# Altium PCB PCB.PcbDoc
Units mm, origin at the board's own origin, x right, y up, seen from the top; angles counter-clockwise.
Board outline 65 x 95 mm, 2 copper layers (Top Layer, Bottom Layer); 35 components, 28 nets, 121 pads, 35 vias.
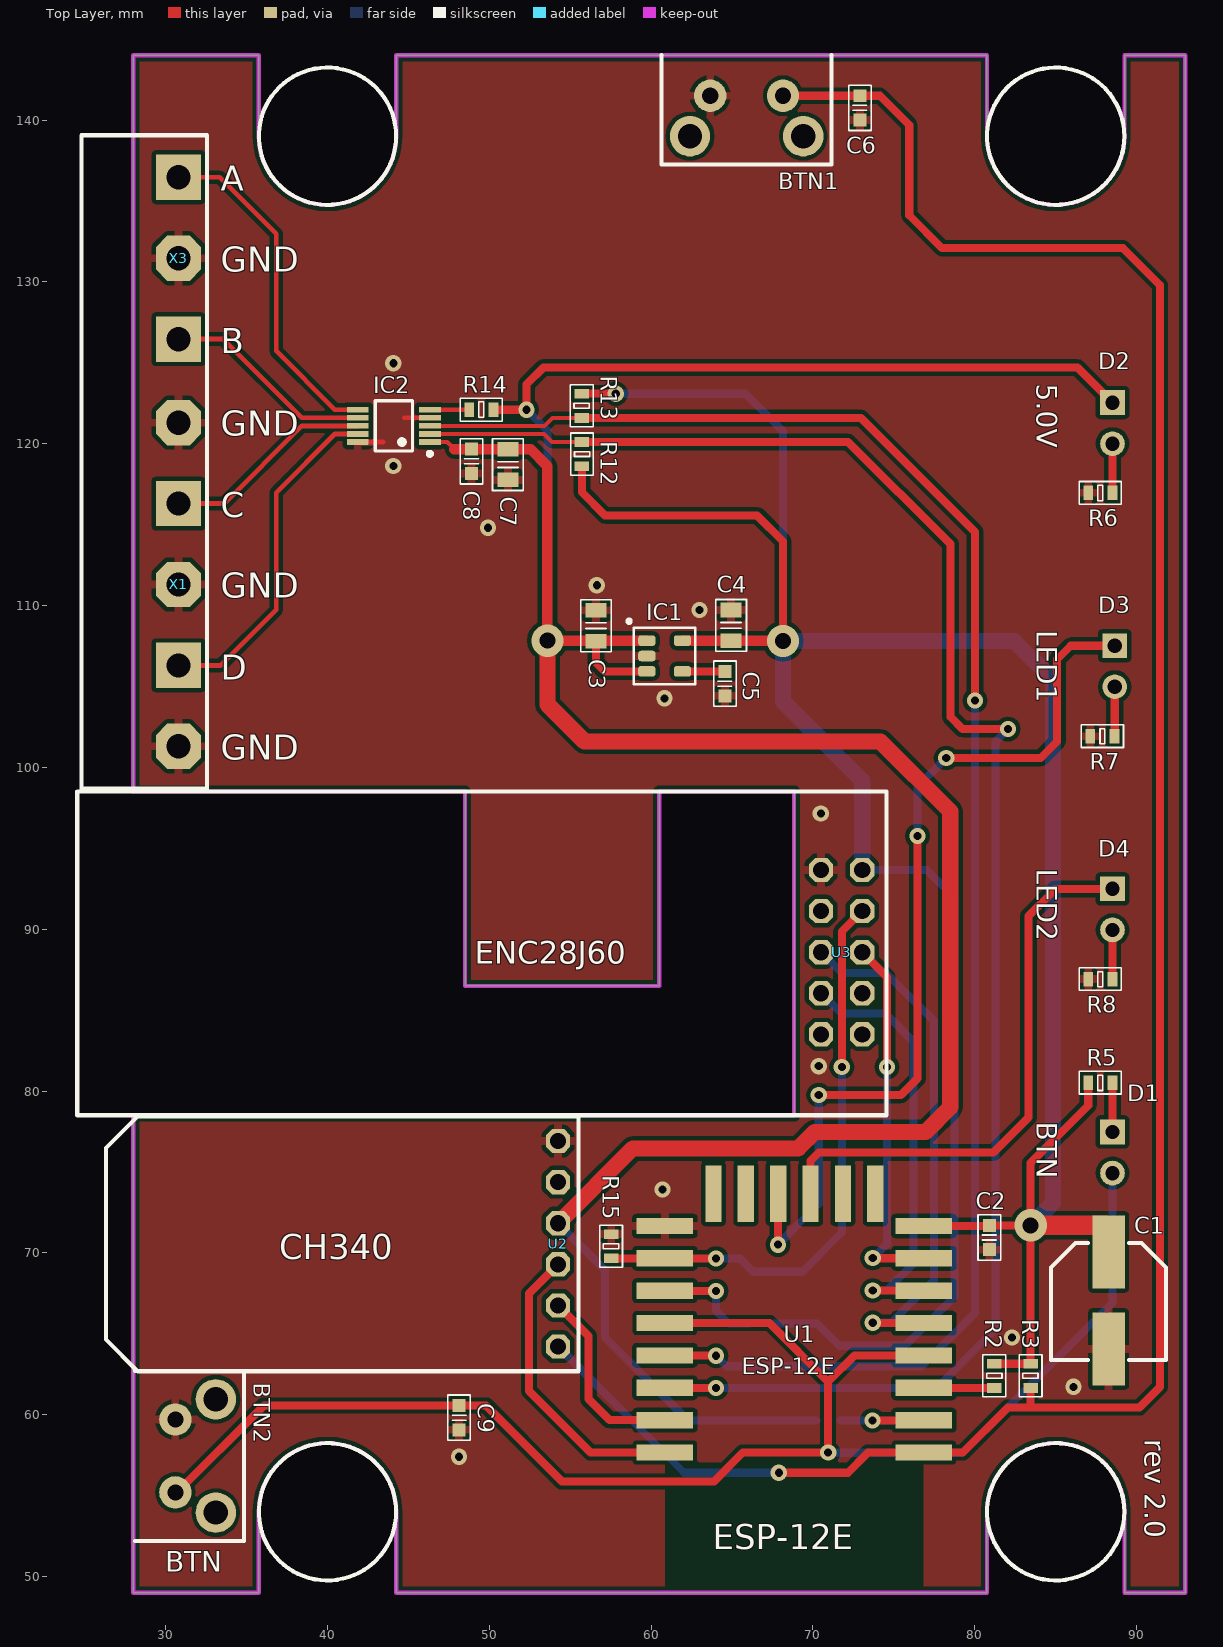
[diagram p0: Top Layer view]
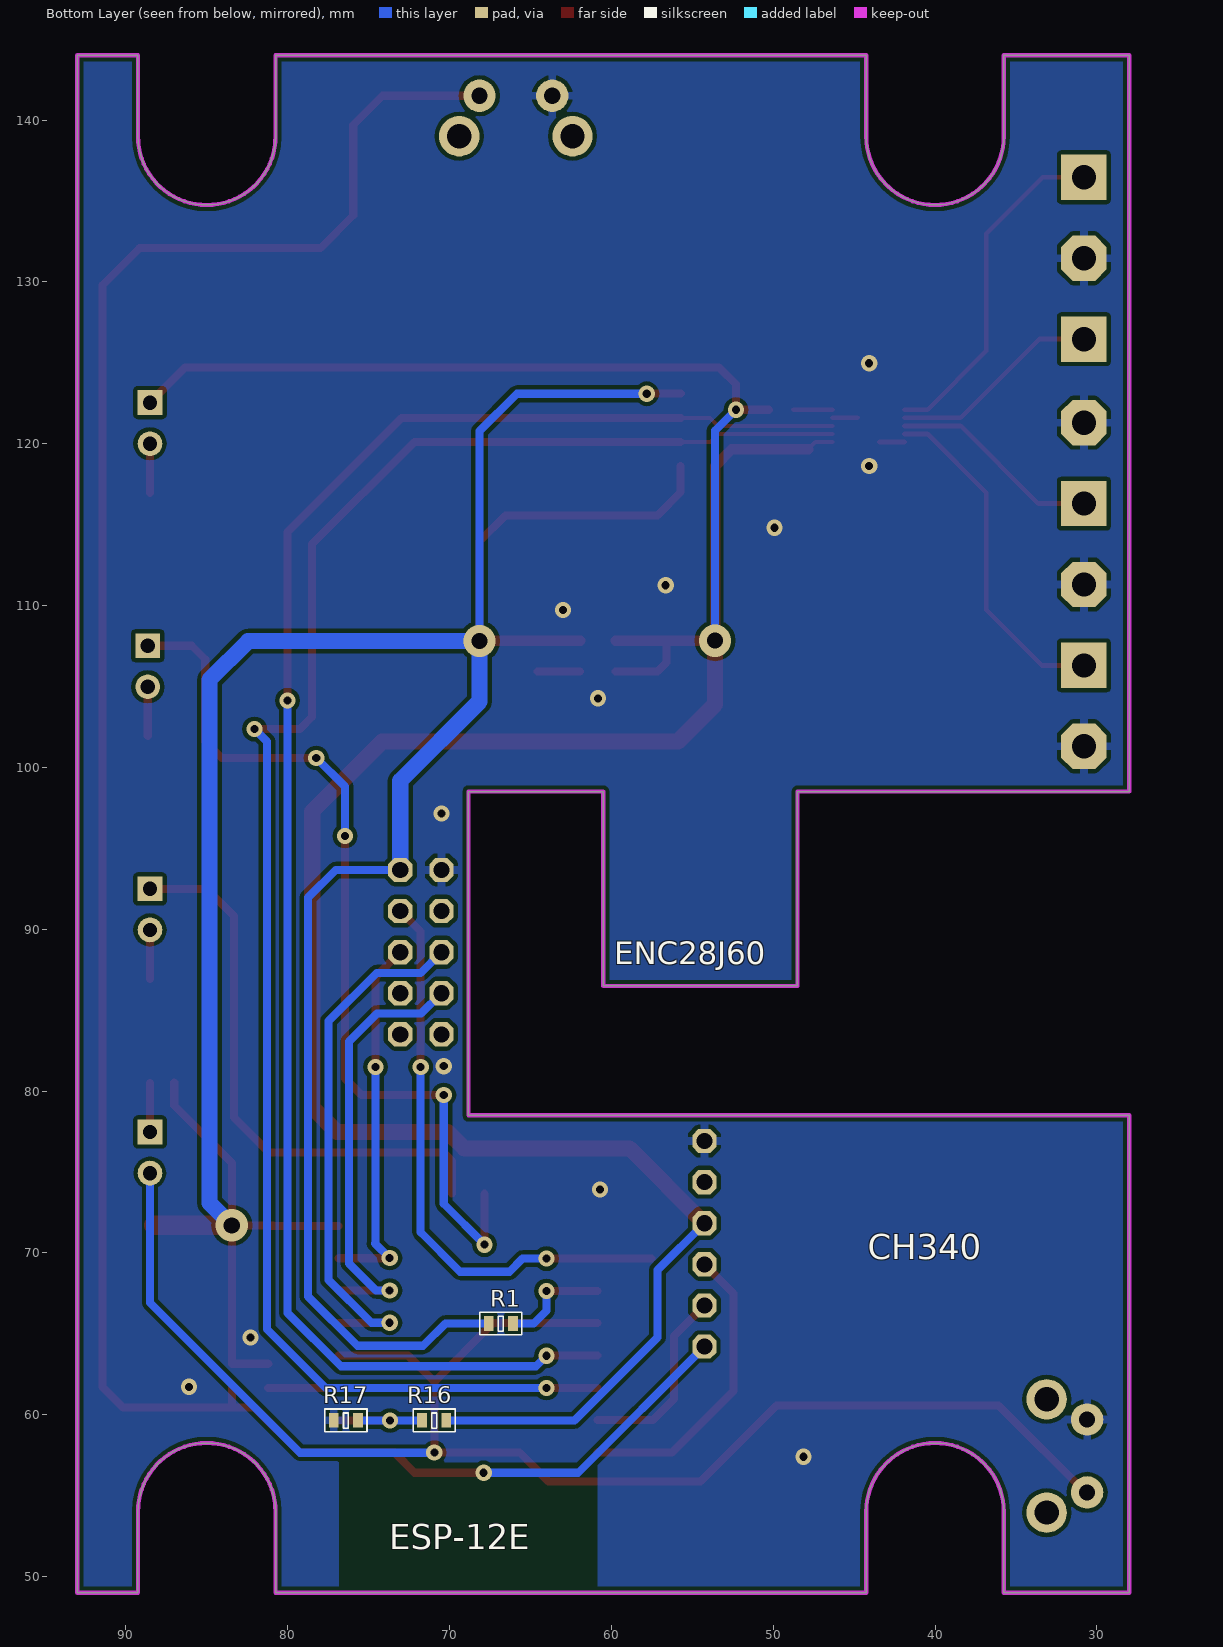
[diagram p1: Bottom Layer view, seen from below]
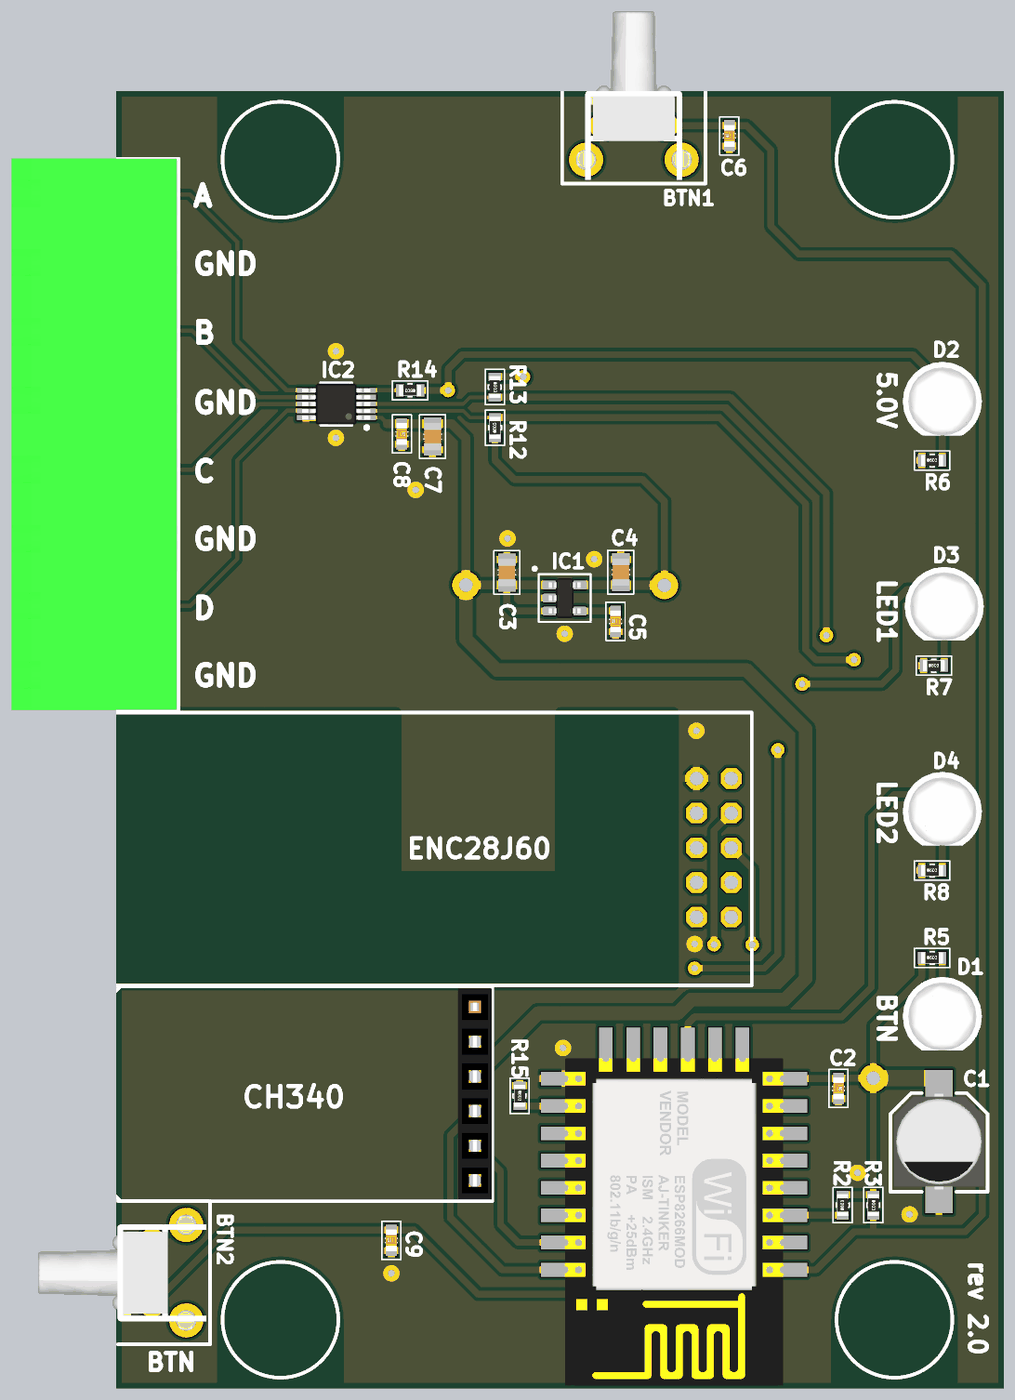
[diagram p2: 3D render of the assembled board from above, using the file's embedded part models]
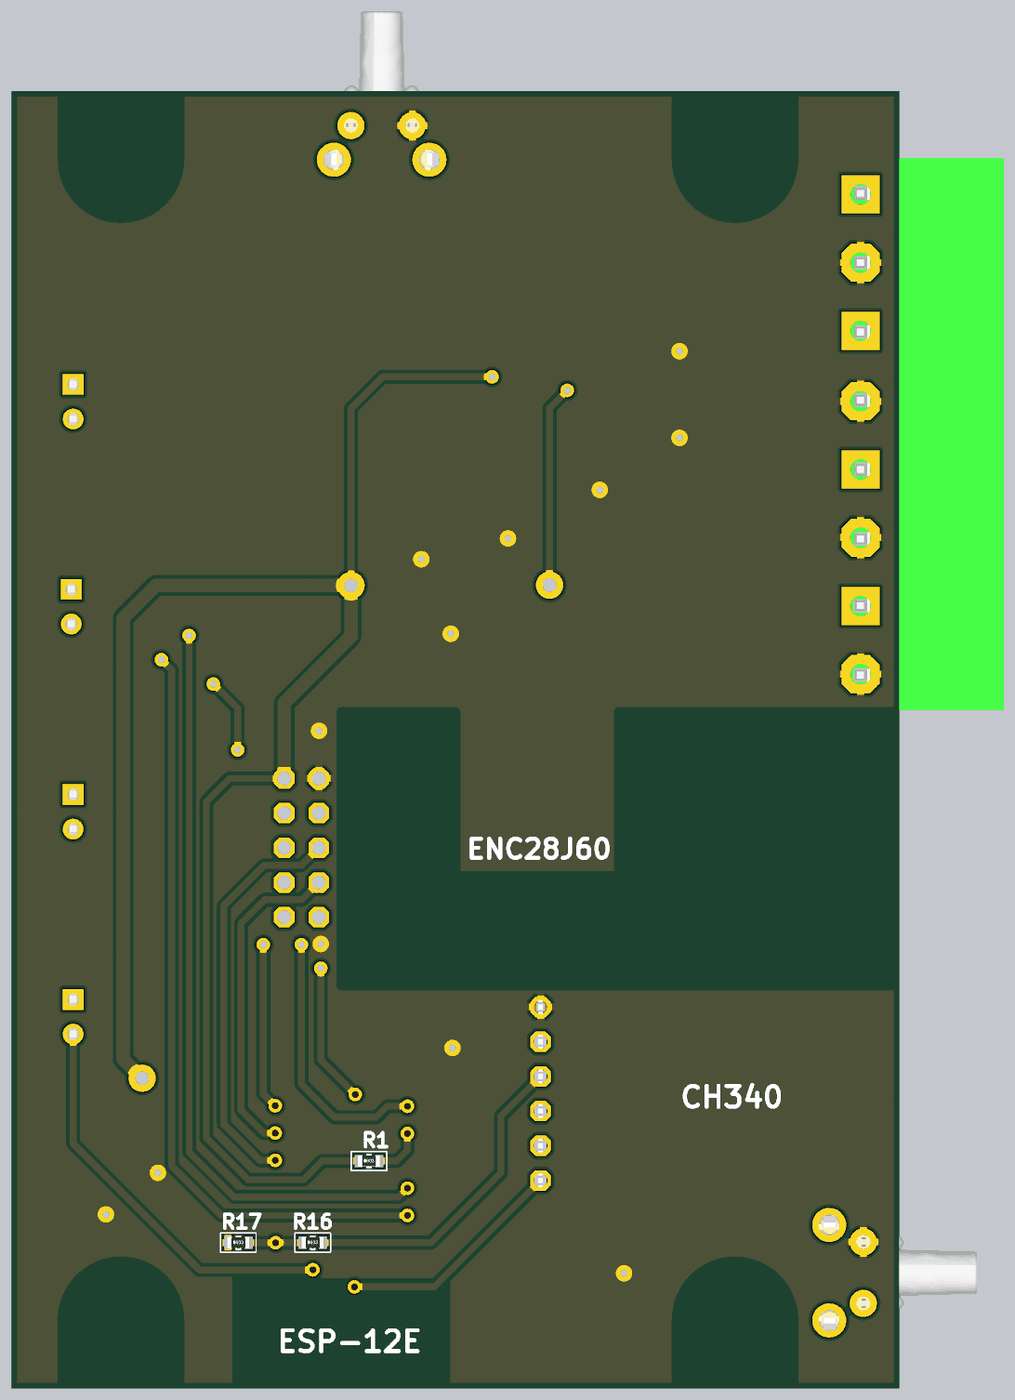
[diagram p3: 3D render of the assembled board from below, using the file's embedded part models]

## Layer stack, top to bottom
Top Solder: solder mask 0.0102, Solder Resist, Dk 3.5
Top Layer: signal copper 0.0356
Dielectric 1: dielectric 0.32, FR-4, Dk 4.8
Bottom Layer: signal copper 0.0356
Bottom Solder: solder mask 0.0102, Solder Resist, Dk 3.5

## Board outline
28,49 35.75,49 35.75,54 cw(c40,54) 44.25,54 44.25,49 80.75,49 80.75,54 cw(c85,54) 89.25,54 89.25,49 93,49 93,144 89.25,144 89.25,139 cw(c85,139) 80.75,139 80.75,144 44.25,144 44.25,139 cw(c40,139) 35.75,139 35.75,144 28,144 28,98.5 48.5,98.5 48.5,86.5 60.5,86.5 60.5,98.5 68.834,98.5 68.834,78.5 28,78.5

## Design rules (kind name [scope] priority, off if disabled: settings)
Clearance [All] p1: gap=0.127 ignorepadtopadclearanceinfootprint=FALSE except(0.254: Arc-Poly Track-Poly SMDPad-Poly THPad-Poly Via-Poly Fill-Poly Poly-Poly)
ComponentClearance [All] p1: gap=0.254 collisioncheckmode=3 verticalgap=-0.254 showdistances=FALSE
HoleSize [All] p1: absolutevalues=TRUE maxlimit=3 minlimit=0.025 maxpercent=80.000 minpercent=20.000
MinimumSolderMaskSliver [All] p1: minsoldermaskwidth=0
PolygonConnect [All] p1: thpad.connectstyle=Relief thpad.reliefconductorwidth=0.508 thpad.reliefentries=4 thpad.polygonreliefangle="90 Angle" thpad.airgapwidth=0.254 smdpad.connectstyle=Relief smdpad.reliefconductorwidth=0.508 smdpad.reliefentries=4 smdpad.polygonreliefangle="90 Angle" smdpad.airgapwidth=0.254 via.connectstyle=Direct via.reliefconductorwidth=0.508 via.reliefentries=4 via.polygonreliefangle="90 Angle" via.airgapwidth=0.254
RoutingVias [All] p1: holewidth=0.5 width=1 viastyle="Through Hole" minholewidth=0.5 minwidth=1 maxholewidth=1 maxwidth=2
SilkToSilkClearance [All] p1: silktosilkclearance=0
SilkToSolderMaskClearance [IsPad] p1: minsilkscreentomaskgap=0 clearancetoexposedcopper=TRUE
SolderMaskExpansion [All] p1: expansion=0.102
Width [All] p1: maxlimit=2.54 minlimit=0.15 preferedwidth=0.254
25 further rules are at their usual default settings.

## Components (designator, comment, footprint, x,y, rotation, side; value= is the part's Value field where it differs from the comment)
BTN1 "Push Button" "PUSH BUTTON RIGHT ANGLE" 65.9,139 r180 top
BTN2 "Push Button" "PUSH BUTTON RIGHT ANGLE" 33.1,57.45 r270 top
C1 "100u" R79 88.265,67.056 r0 top
C2 "100n" C_0603 80.9,70.95 r270 top
C3 "1u" C_0805 56.595,108.754 r270 top
C4 "1u" C_0805 64.94,108.775 r270 top
C5 "10n" C_0603 64.559,105.168 r90 top
C6 "470p" C_0603 72.9,140.75 r90 top
C7 "10u" C_0805 51.15,118.71 r90 top
C8 "100n" C_0603 48.9,118.91 r270 top
C9 "470p" C_0603 48.133,59.817 r90 top
D1 "*" LED_5mm 88.508,77.47 r270 top
D2 "*" LED_5mm 88.508,122.54 r270 top
D3 "*" LED_5mm 88.646,107.517 r270 top
D4 "*" LED_5mm 88.508,92.493 r270 top
IC1 "LP2985" SOT23-5 59.733,107.83 r0 top
IC2 "MCP4728" MSOP-10 44.1,121.1 r180 top
R1 "12k" R_0603 66.827,65.634 r180 bottom
R2 "12k" R_0603 81.2,62.4 r90 top
R3 "10k" R_0603 83.45,62.4 r270 top
R5 "470" R_0603 87.757,80.518 r0 top
R6 "1k" R_0603 87.757,116.967 r0 top
R7 "470" R_0603 87.884,101.93 r0 top
R8 "470" R_0603 87.757,86.919 r0 top
R12 "4.7k" R_0603 55.722,119.36 r90 top
R13 "4.7k" R_0603 55.712,122.34 r270 top
R14 "100k" R_0603 49.505,122.098 r180 top
R15 "1k" R_0603 57.531,70.409 r270 top
R16 "6.8k" R_0603 70.95,59.65 r180 bottom
R17 "6.8k" R_0603 76.4,59.65 r180 bottom
U1 "ESP-12E" ESP-12E 68.851,65.662 r180 top
U2 "CH340" CH340 54.25,70.56 r0 top
U3 "ENC28J60" ENC28J60 73.04,83.5 r180 top
X1 "DG-300-5" 2EDGR-5.08-05P 30.8,111.3 r0 top
X3 "DG-300-3" 2EDGR-5.08-03P 30.8,131.46 r0 top

## Footprints (in the part's own frame and the unit in brackets; to place one, negate y for a bottom-side part, rotate by r counter-clockwise, add the part's x,y. Pads: shape width x height; smd on the part's side, far side on the other; paste and mask are expansions set on the pad)
2EDGR-5.08-03P [mm]
  rect 2.8x2.8 hole 1.5: 1(0,5) 3(0,-5)
  oct 2.8x2.8 hole 1.5: 2(0,0)
  silkscreen extent -6,-7.6 1.75,7.6, body extent -10.5,-7.62 1.6,7.62, height 8.4
2EDGR-5.08-05P [mm]
  oct 2.8x2.8 hole 1.5: 1(0,10) 3(0,0) 5(0,-10)
  rect 2.8x2.8 hole 1.5: 2(0,5) 4(0,-5)
  silkscreen extent -6,-12.6 1.75,12.6, body extent -10.5,-12.6 1.61,12.62, height 8.4
C_0603 [mm] "Chip Capacitor; Body 1.6 x 0.8 mm (LxW typ)"
  rect 0.8x0.8 smd: 1(-0.75,0) 2(0.75,0)
  silkscreen extent -1.4,-0.7 1.4,0.7, body extent -0.8,-0.4 0.8,0.4, height 0.3
C_0805 [mm] "Capacitor Pattern"
  rect 0.9x1.3 smd: 1(-0.95,0) 2(0.95,0)
  silkscreen extent -1.6,-0.95 1.6,0.95, body extent -1,-0.63 1,0.62, height 0.6
CH340 [mm]
  oct 1.5x1.5 hole 1: 1(0,6.35) 2(0,3.81) 3(0,1.27) 4(0,-1.27) 5(0,-3.81) 6(0,-6.35)
  silkscreen extent -27.94,-7.87 1.27,7.87, body extent -1.25,-7.74 1.25,7.75, height 8.5
ENC28J60 [mm]
  oct 1.5x1.5 hole 1: 1(0,0) 2(2.54,0) 3(0,-2.54) 4(2.54,-2.54) 5(0,-5.08) 6(2.54,-5.08) 7(0,-7.62) 8(2.54,-7.62) 9(0,-10.16) 10(2.54,-10.16)
  silkscreen extent -1.5,-15 48.5,5
ESP-12E [mm]
  rect 3.5x1 smd: 1(-8,8) 2(-8,6) 3(-8,4) 4(-8,2) 5(-8,0) 6(-8,-2) 7(-8,-4) 8(-8,-6) 15(8,-6) 16(8,-4) 17(8,-2) 18(8,0) 19(8,2) 20(8,4) 21(8,6) 22(8,8)
  rect 1x3.5 smd: 9(-5,-8) 10(-3,-8) 11(-1,-8) 12(1,-8) 13(3,-8) 14(5,-8)
  body extent -8.01,-7.5 8.01,16.5, height 2.65
LED_5mm [mil]
  rect 60x60 hole 35: 1(0,0)
  round 60 hole 35: 2(100,0)
  body extent -65,-114 148,114, height 520
MSOP-10 [mm]
  rect 1.35x0.35 smd: 1(-2.225,1) 2(-2.225,0.5) 3(-2.225,0) 4(-2.225,-0.5) 5(-2.225,-1) 6(2.225,-1) 7(2.225,-0.5) 8(2.225,0) 9(2.225,0.5) 10(2.225,1)
  silkscreen extent -2.35,-1.55 1.15,1.85, body extent -2.5,-1.5 2.53,1.5, height 1.05
"PUSH BUTTON RIGHT ANGLE" [mm]
  round 2.5 hole 1.5: 0(-3.5,0) 0(3.5,0)
  round 2 hole 1: 1(-2.25,-2.5) 2(2.25,-2.5)
  silkscreen extent -5.25,-5 5.25,1.75, body extent -4.19,-10.84 4.21,1.46, height 8.3
R79 [mm]
  rect 2x4.5 smd: 1(0,3) 2(0,-3)
  silkscreen extent -3.56,-3.68 3.56,3.56, body extent -3.3,-3.5 3.3,3.5, height 3.91
R_0603 [mm]
  rect 0.6x0.9 smd: 1(-0.75,0) 2(0.75,0)
  silkscreen extent -1.3,-0.7 1.3,0.7, body extent -0.8,-0.41 0.8,0.41, height 0.45
SOT23-5 [mm]
  rrect50% 1.06x0.65 smd: 1(0,0) 2(0,-0.95) 3(0,-1.9) 4(2.2,-1.9) 5(2.2,0)
  silkscreen extent -1.2,-2.7 3,1.3, body extent -0.07,-2.41 2.27,0.51, height 1

## Part data
BTN1 BTN2: "Push button"
C1: library part Electrolit, "Electrolit capasitor"
C2 C5 C6 C8 C9: library part C0603, "Capacitor"
C3 C4 C7: library part C0805, "Capacitor"
D1 D2 D3 D4: library part LED_5mm, "Typical INFRARED GaAs LED"
IC1: "150-mA Low-noise Low-dropout Regulator With Shutdown", Link=https://www.rcscomponents.kiev.ua/product/lp2985a-33dbvr_31082.html
IC2: "12-Bit, Quad Digital-to-Analog Converter with EEPROM Memory"
R1 R2 R3 R5 R6 R7 R8 R12 R13 R14 R15 R16 R17: library part R0603, "Resistor"
U1: "WiFi Module"
U2: "USB to TTL UART CH340"
U3: "ENC28J60 mini Ethernet module"

## Via types
v1: diameter 1, hole 0.5, Top Layer to Bottom Layer, 32 vias
v2: diameter 2, hole 1, Top Layer to Bottom Layer, 3 vias

## Nets (pads, with @x,y where several pads share a name; then routed paths per layer and width w, separated by ;. In a path a pad name is that pad's centre, name@x,y a point inside that pad or via, vN(x,y) a via of type N, cw(c..) or ccw(c..) an arc to the next point about the centre after c; other vN are vias at no path point)
3.3V: C1.1 C2.1 C4.2 IC1.5 R1.1 R2.2 R3.1 R5.1 R12.1 R13.1 U1.8 U3.9 | length 198.8
  Top Layer w0.5: R13.1 57.809,123.09 v1(57.81,123.088) ; R12.1 55.722,116.998 57.15,115.57 66.548,115.57 68.145,113.973 68.145,107.825 v2(68.145,107.804) ; U1.8 80.862,71.662 C2.1 80.95,71.65 81,71.7 v2(83.45,71.7) ; R2.2 R3.1 v2(83.45,71.7) ; R5.1 87.007,79.108 83.45,75.551 v2(83.45,71.7)
  Top Layer w0.65: IC1.5 C4.2@64.94,107.83 ; C4.2 v2@68.145,107.825
  Top Layer w1.2: v2(83.45,71.7) C1.1@88.265,71.7
  Bottom Layer w0.5: v1(57.81,123.088) 65.837,123.088 68.145,120.78 v2(68.145,107.804) ; R1.1 70.256,65.634 71.628,64.262 75.692,64.262 78.74,67.31 78.74,91.948 77.028,93.66 U3.9
  Bottom Layer w1: U3.9 73.04,99.172 68.145,104.067 v2(68.145,107.804) 82.442,107.804 84.836,105.41 84.836,73.086 v2(83.45,71.7)
5.0V: C3.2 C7.2 C8.1 D2.1 IC1.1 IC1.3 IC2.1 R14.1 R16.2 U2.3 | length 186
  Top Layer w0.254: IC2.1 47.4,120.1 47.84,119.66
  Top Layer w0.5: R14.1 v1(52.299,122.098) 52.299,123.673 53.34,124.714 86.334,124.714 D2.1 ; C3.2 56.595,106.473 57.138,105.93 IC1.3
  Top Layer w0.65: 47.84,119.66 C8.1 C7.2 52.552,119.66 53.594,118.618 v2(53.594,107.83) IC1.1
  Top Layer w1: v2(53.594,107.83) 53.594,103.886 55.88,101.6 74.168,101.6 78.486,97.282 78.486,78.994 76.962,77.47 70.104,77.47 69.088,76.454 58.874,76.454 U2.3
  Bottom Layer w0.5: v1(52.299,122.098) 53.594,120.802 v2(53.594,107.83) ; U2.3 57.15,68.93 57.15,64.77 62.27,59.65 R16.2
BTN: BTN2.2 C9.2 D1.2 U1.4 U1.18 | length 97.4
  Top Layer w0.5: BTN2.2@30.5,55 36.079,60.579 49.784,60.579 54.483,55.88 63.881,55.88 65.663,57.662 v1(70.938,57.662) 70.938,62.038 ; U1.18 67.314,65.662 70.938,62.038 ; U1.4 72.562,63.662 70.938,62.038
  Bottom Layer w0.5: v1@70.95,57.65 79.24,57.65 88.508,66.918 D1.2
CS: R15.2 U1.16 U3.7 | length 35.9
  Top Layer w0.5: R15.2 57.534,69.662 U1.16 ; U1.16@60.858,69.655 v1@63.995,69.655 ; v1@71.78,81.458 v1(71.78,81.483) 71.78,89.86 U3.7
  Bottom Layer w0.5: v1(64.007,69.643) 65.485,69.643 66.294,68.834 69.342,68.834 71.78,71.272 v1@71.78,81.458
DAC_A: IC2.6 X3.1 | length 21.3
  Top Layer w0.3: X3.1 33.339,136.46 36.83,132.969 36.83,125.73 40.46,122.1 IC2.6
DAC_B: IC2.7 X3.3 | length 13.1
  Top Layer w0.3: X3.3 33.56,126.46 38.42,121.6 IC2.7
DAC_C: IC2.8 X1.2 | length 13.1
  Top Layer w0.3: X1.2 33.62,116.3 38.42,121.1 IC2.8
DAC_D: IC2.9 X1.4 | length 21.2
  Top Layer w0.3: X1.4 33.399,106.3 36.83,109.731 36.83,116.97 40.46,120.6 IC2.9
GND: BTN1.2 BTN2.1 C1.2 C2.2 C3.1 C4.1 C5.1 C6.1 C7.1 C8.2 C9.1 IC1.2 IC2.4 IC2.10 R6.1 R7.1 R8.1 R15.1 R17.1 U1.15 U2.1 U3.10 X1.1 X1.3 X1.5 X3.2 | length 3.1
  Top Layer w0.3: IC2.10 43.434,120.1 ; 44.77,121.6 IC2.4
  other v1: 48.133,57.404 86.106,61.722 82.296,64.77 60.706,73.914 70.358,81.534 70.485,97.155 60.833,104.267 62.992,109.728 56.642,111.252 49.911,114.808 44.069,118.618 44.069,124.968
LED1: D3.1 U1.12 | length 56.8
  Top Layer w0.5: v1@67.844,70.518 U1.12@67.844,73.655 ; v1(70.358,79.756) 75.438,79.756 76.454,80.772 v1(76.454,95.758) ; v1(78.232,100.584) 84.074,100.584 85.09,101.6 85.09,106.68 85.927,107.517 D3.1
  Bottom Layer w0.5: v1(67.832,70.506) 70.358,73.032 v1(70.358,79.756) ; v1(76.454,95.758) 76.454,98.806 v1(78.232,100.584)
LED2: D4.1 U1.11 | length 34.9
  Top Layer w0.5: U1.11 69.851,75.693 70.358,76.2 81.153,76.2 83.312,78.359 83.312,90.805 85,92.493 D4.1
MISO: U1.6 U3.4 | length 27
  Top Layer w0.5: v1@73.707,67.669 U1.6@76.844,67.669
  Bottom Layer w0.5: U3.4 71.755,84.785 74.473,84.785 76.2,83.058 76.2,69.342 74.539,67.681 v1(73.695,67.681)
MOSI: U1.7 U3.5 | length 23.1
  Top Layer w0.5: U3.5 74.574,87.046 v1(74.574,81.483) ; v1@73.707,69.669 U1.7@76.844,69.669
  Bottom Layer w0.5: v1(73.695,69.681) 74.6,70.585 74.574,70.61 v1(74.574,81.483)
NetC5_2: C5.2 IC1.4 | length 2.6
  Top Layer w0.5: IC1.4 C5.2@64.571,105.93
NetD1_1: D1.1 R5.2 | length 3
  Top Layer w0.5: D1.1 R5.2@88.508,80.502
NetD2_2: D2.2 R6.2 | length 3
  Top Layer w0.5: R6.2 88.508,116.968 D2.2
NetD3_2: D3.2 R7.2 | length 3
  Top Layer w0.5: R7.2@88.646,101.945 D3.2
NetD4_2: D4.2 R8.2 | length 3
  Top Layer w0.5: R8.2@88.508,86.921 D4.2
NetIC2_5: IC2.5 R14.2 | length 2.4
  Top Layer w0.3: IC2.5 48.752,122.1 R14.2
NetR1_2: R1.2 U1.17 | length 6.8
  Top Layer w0.5: U1.17@60.858,67.655 v1@63.995,67.655
  Bottom Layer w0.5: v1(64.007,67.643) 64.007,66.422 64.795,65.634 R1.2
NetR2_1: R2.1 U1.3 | length 4.3
  Top Layer w0.5: U1.3 R2.1@81.2,61.662
NetR16_1: R16.1 R17.2 U1.2 | length 7.1
  Top Layer w0.5: v1@73.682,59.63 U1.2@76.819,59.63
  Bottom Layer w0.5: R16.1@71.7,59.642 v1(73.67,59.642) R17.2@75.65,59.642
nRST: BTN1.1 C6.2 R3.2 U1.1 U2.6 | length 143.3
  Top Layer w0.5: v1(67.888,56.412) 72.16,56.412 73.41,57.662 U1.1 79.252,57.662 82.042,60.452 83.45,60.452 ; BTN1.1 74.146,141.5 75.946,139.7 75.946,134.112 77.978,132.08 89.154,132.08 91.44,129.794 91.44,61.722 90.17,60.452 83.45,60.452 ; R3.2 83.45,60.452
  Bottom Layer w0.5: U2.6 62.048,56.412 v1(67.888,56.412) v1@67.9,56.4
RXD: U1.21 U2.5 | length 11.8
  Top Layer w0.5: U2.5 56.134,64.866 56.134,60.96 57.432,59.662 U1.21
SCK: U1.5 U3.6 | length 32.7
  Top Layer w0.5: v1@73.707,65.669 U1.5@76.844,65.669
  Bottom Layer w0.5: U3.6 71.78,87.3 74.498,87.3 77.47,84.328 77.47,68.326 74.825,65.681 v1(73.695,65.681)
SCL: IC2.2 R12.2 U1.20 | length 108.8
  Top Layer w0.254: IC2.2 53.39,120.6 53.88,120.11 R12.2
  Top Layer w0.5: R12.2 72.168,120.11 78.486,113.792 78.486,103.124 79.248,102.362 v1(82.042,102.362) ; U1.20@60.858,61.655 v1@63.995,61.655
  Bottom Layer w0.5: v1(64.007,61.643) 77.645,61.643 81.28,65.278 81.28,101.6 v1(82.042,102.362)
SDA: IC2.3 R13.2 U1.19 | length 105.8
  Top Layer w0.254: IC2.3 53.409,121.1 53.899,121.59 R13.2
  Top Layer w0.5: R13.2 72.974,121.59 80.01,114.554 v1(80.01,104.14) ; U1.19@60.858,63.655 v1@63.995,63.655
  Bottom Layer w0.5: v1(64.007,63.643) 64.658,62.992 76.708,62.992 80.01,66.294 v1(80.01,104.14)
TXD: U1.22 U2.4 | length 18.5
  Top Layer w0.5: U2.4 52.451,67.491 52.451,61.468 56.257,57.662 U1.22
pads on no net: BTN1.0 BTN2.0 U1.9 U1.10 U1.13 U1.14 U2.2 U3.1 U3.2 U3.3 U3.8

## Polygon pours and split planes (outlines as drawn)
GND on Top Layer "Top Layer-GND" (solid, remove dead copper, pour order 0): 28,144 93,144 93,49 28,49
GND on Bottom Layer "Bottom Layer-GND" (solid, remove dead copper, pour order 2): 28,144 93,144 93,49 28,49

## Keep-outs
Keep-Out Layer:
  the board outline again, w0.254

## Other copper
Top Layer:
  pour cut-out: 60.85,57.05 76.85,57.05 76.85,49 60.85,49
Bottom Layer:
  pour cut-out: 60.85,57.05 76.85,57.05 76.85,49 60.85,49

## Silkscreen, mask and mechanical layers (free items; w line width, h text height)
Top Overlay:
  circle w0.254: c40,54 r4.243
  circle w0.254: c85,54 r4.243
  circle w0.254: c85,139 r4.243
  circle w0.254: c40,139 r4.243
  text "A" at 33.401,135.636 h1.52
  text "GND" at 33.401,130.636 h1.52
  text "B" at 33.401,125.603 h1.52
  text "5.0V" at 83.82,123.698 h1.27 r270
  text "GND" at 33.401,120.476 h1.52
  text "C" at 33.401,115.443 h1.52
  text "GND" at 33.401,110.476 h1.52
  text "LED1" at 83.82,108.458 h1.27 r270
  text "D" at 33.401,105.41 h1.52
  text "GND" at 33.401,100.476 h1.52
  text "LED2" at 83.82,93.726 h1.27 r270
  text "ENC28J60" at 49.098,87.859 h1.4
  text "BTN" at 83.82,78.105 h1.27 r270
  text "CH340" at 37.033,69.596 h1.52
  text "rev 2.0" at 90.5,58.471 h1.27 r270
  text "ESP-12E" at 63.8,51.7 h1.52
  text "BTN" at 29.972,50.292 h1.27
Bottom Overlay:
  text "ENC28J60" at 59.817,87.833 h1.4
  text "ESP-12E" at 73.711,51.689 h1.52

## Dimensions
44.25,54 to 28,49 on Mechanical 1
35.75,139 to 44.25,54 on Mechanical 1
35.75,139 to 80.75,139 on Mechanical 1
35.75,139 to 0,0 on Mechanical 1
28,49 to 93,49 on Mechanical 1
28,144 to 28,49 on Mechanical 1